# Altium PCB 整板PCB.PCBDOC
Units mil, origin at the board's own origin, x right, y up, seen from the top; angles counter-clockwise.
Board outline 4400 x 7900 mil, 2 copper layers (Top Layer, Bottom Layer); 64 components, 47 nets, 1632 pads, 16 vias.
Unrouted connection lines stored in the file: 2.
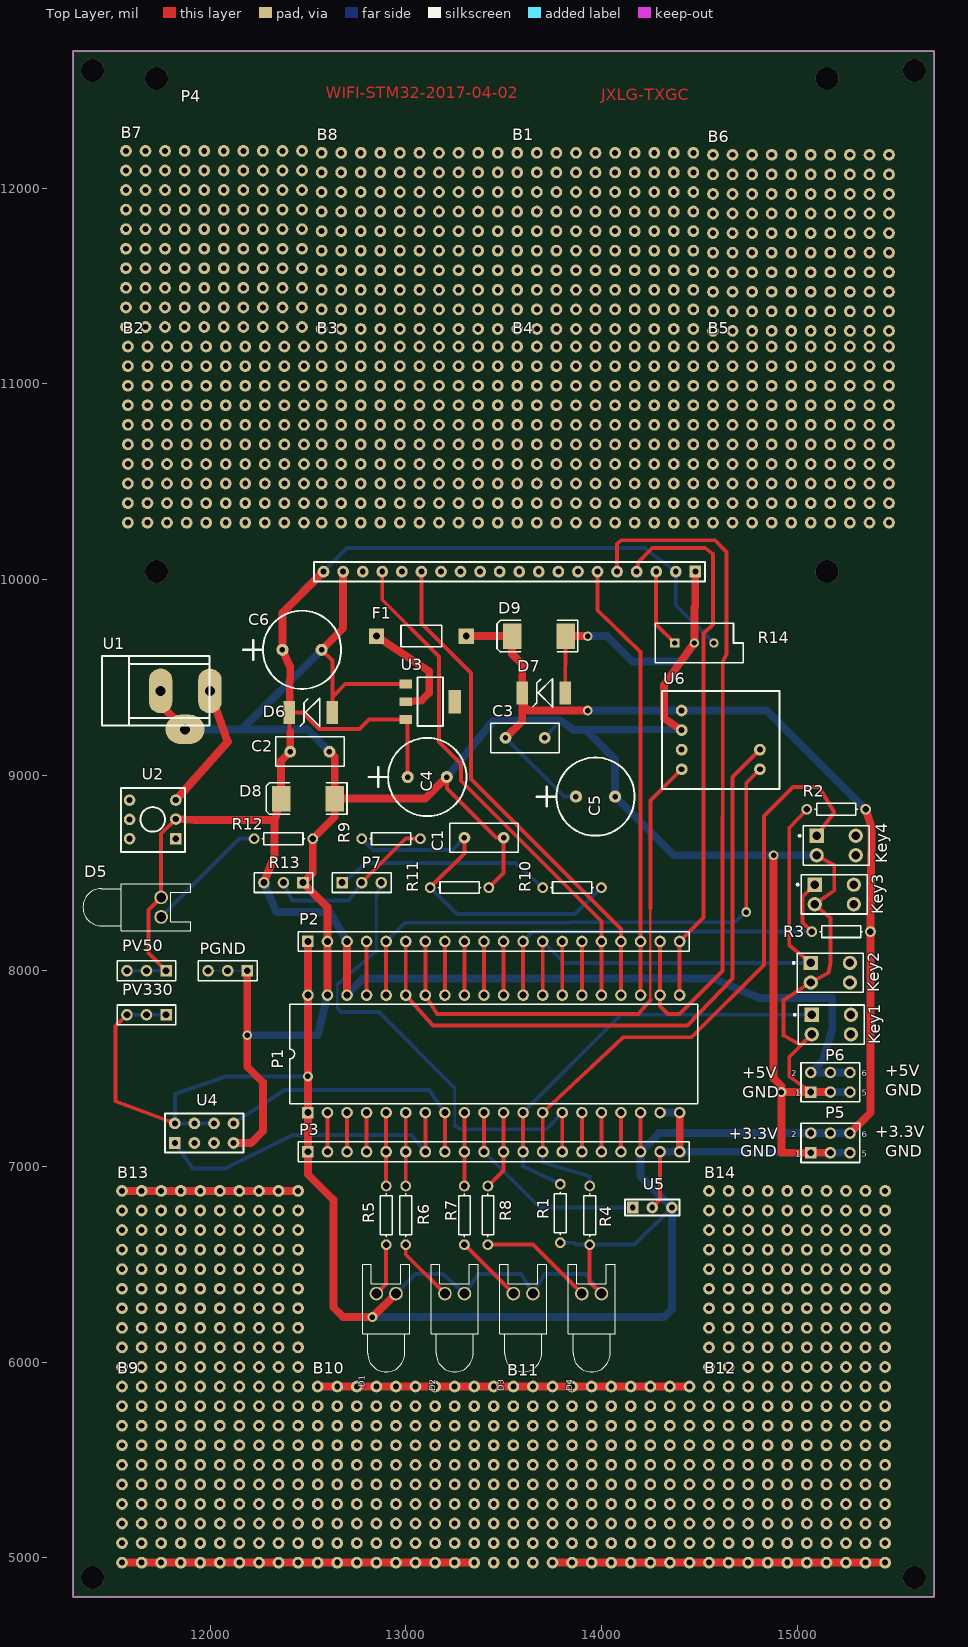
[diagram p0: Top Layer view]
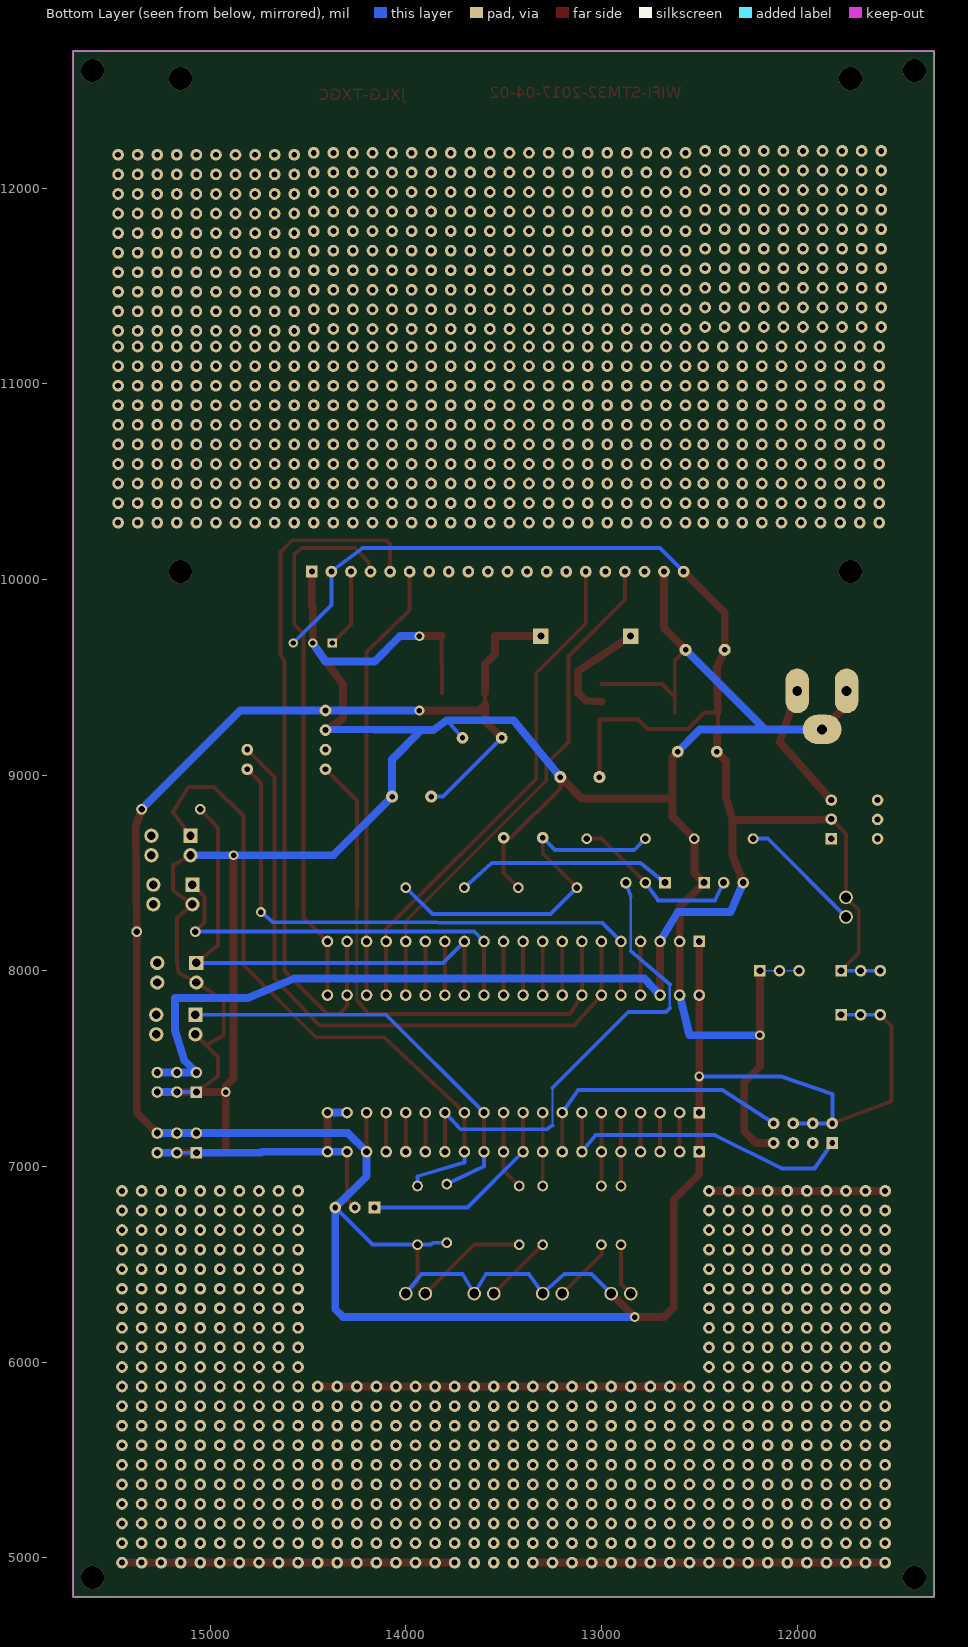
[diagram p1: Bottom Layer view, seen from below]

## Layer stack, top to bottom
Top Solder: solder mask 0.4, Solder Resist, Dk 3.5
Top Layer: signal copper 1.4
Dielectric1: dielectric 12.6, FR-4, Dk 4.8
Bottom Layer: signal copper 1.4
Bottom Solder: solder mask 0.4, Solder Resist, Dk 3.5

## Board outline
11300,4800 15700,4800 15700,12700 11300,12700

## Design rules (kind name [scope] priority, off if disabled: settings)
Clearance [All] p1: gap=10
FabricationTestPointUsage TestPointUsage [All] p1: valid=0 allowmultiple=FALSE
FabricationTestpoint Testpoint [(IsPad And (OnTopLayer Or OnBottomLayer))] p1: side=3 testpointundercomponent=TRUE minsize=40 maxsize=100 preferedsize=60 minholesize=0 maxholesize=40 preferedholesize=32 testpointgrid=1 allowsidetop=TRUE allowsidebottom=TRUE usegrid=TRUE gridtolerance=0.01
PolygonConnect [All] p1: connectstyle=Relief reliefconductorwidth=10 reliefentries=4 polygonreliefangle="90 Angle" airgapwidth=10
RoomDefinition POWER [InComponentClass('POWER')] p1: confinementstyle=ConfineIn formatcopy=TRUE lockcomponents=FALSE outline 0,0 2000,0 2000,1000 0,1000
RoomDefinition Peripherals [InComponentClass('Peripherals')] p2: confinementstyle=ConfineIn formatcopy=TRUE lockcomponents=FALSE outline 0,0 2000,0 2000,1000 0,1000
RoutingVias [All] p1: holewidth=28 width=50 viastyle="Through Hole" minholewidth=28 minwidth=50 maxholewidth=28 maxwidth=50
SolderMaskExpansion [All] p1: expansion=4
UnpouredPolygon [All] p1: allowunpoured=FALSE
Width [All] p1: maxlimit=40 minlimit=12 preferedwidth=20
27 further rules are at their usual default settings.

## Classes and differential pairs
component class Peripherals: C1 D1 D2 D3 D4 D6 D7 Key1 Key2 Key3 Key4 P1 P2 P3 P4 P5 P6 P7 PGND PV50 PV330 R1 R2 R3 R4 R5 R6 R7 R8 R9 R10 R11 R13 R14 U4 U5 U6
component class POWER: B1 B2 B3 B4 B5 B6 B7 B8 B9 B10 B11 B12 B13 B14 C2 C3 C4 C5 C6 D5 D8 D9 F1 R12 U1 U2 U3

## Components (designator, comment, footprint, x,y, rotation, side; value= is the part's Value field where it differs from the comment)
B1 "PAD" board 13570,12180 r0 top
B2 "PAD" board 11580,11190 r0 top
B3 "PAD" board 12570,11190 r0 top
B4 "PAD" board 13570,11190 r0 top
B5 "PAD" board 14570,11190 r0 top
B6 "PAD" board 14570,12170 r0 top
B7 "PAD" board 11570,12190 r0 top
B8 "PAD" board 12570,12180 r0 top
B9 "PAD" BOARD 11550,5875 r0 top
B10 "PAD" BOARD 12550,5875 r0 top
B11 "PAD" BOARD 13550,5875 r0 top
B12 "PAD" BOARD 14550,5875 r0 top
B13 "PAD" BOARD 11550,6875 r0 top
B14 "PAD" BOARD 14550,6875 r0 top
C1 "Cap" RAD-0.2 13400,8680 r180 top
C2 "Cap" RAD-0.2 12510,9120 r180 top
C3 "Cap" RAD-0.2 13610,9190 r180 top
C4 "Cap Pol1" RB.2/.4 13010,8990 r180 top
C5 "Cap Pol1" RB.2/.4 13870,8890 r180 top
C6 "Cap Pol1" RB.2/.4 12370,9640 r180 top
D1 "LED1" LED-0 12900,6350 r0 top
D2 "LED2" LED-0 13250,6350 r0 top
D3 "LED3" LED-0 13600,6350 r0 top
D4 "LED4" LED-0 13950,6350 r0 top
D5 "LED0" LED-0 11750,8325 r270 top
D6 "SMBJ5.0A" SMBJ 12520,9320 r180 top
D7 "SMBJ3.3A" SMBJ 13710,9420 r180 top
D8 "Diode" SMC 12500,8880 r180 top
D9 "Diode" SMC 13680,9710 r180 top
F1 "Fuse 2" PIN-W2/E2.8 13080,9710 r0 top
Key1 "" DPST-4 15175,7725 r0 top
Key2 "" DPST-4 15170,7990 r0 top
Key3 "" DPST-4 15190,8390 r0 top
Key4 "" DPST-4 15200,8640 r0 top
P1 "STM32F103" 711-03 13450,7575 r0 top
P2 "" HDR1X20 12500,8150 r0 top
P3 "" HDR1X20 12500,7075 r0 top
P4 "LCD" STM32F103C8T6 12580,10040 r0 top
P5 "Header 3X2" HDR2X3 15070,7070 r0 top
P6 "Header 3X2" HDR2X3 15070,7380 r0 top
P7 "" HDR1X3 12675,8450 r0 top
PGND "PINGNG" HDR1X3 12190,8000 r180 top
PV50 "PINV5.0" HDR1X3 11775,8000 r180 top
PV330 "PINV3.30" HDR1X3 11775,7775 r180 top
R1 "Res1" AXIAL-0.3 13790,6760 r270 top
R2 "Res1" AXIAL-0.3 15200,8825 r0 top
R3 "Res1" AXIAL-0.3 15225,8200 r0 top
R4 "Res1" AXIAL-0.3 13940,6750 r270 top
R5 "Res1" AXIAL-0.3 12900,6750 r90 top
R6 "Res1" AXIAL-0.3 13000,6750 r90 top
R7 "Res1" AXIAL-0.3 13300,6750 r90 top
R8 "Res1" AXIAL-0.3 13420,6750 r90 top
R9 "Res1" AXIAL-0.3 12925,8675 r180 top
R10 "Res1" AXIAL-0.3 13850,8425 r180 top
R11 "Res1" AXIAL-0.3 13275,8425 r180 top
R12 "Res1" AXIAL-0.3 12375,8675 r180 top
R13 "" HDR1X3 12475,8450 r180 top
R14 "W104" VR5 14475,9675 r0 top
U1 "DC005" POWER 11975,9125 r0 top
U2 "BUTTON" BTN8.5*8.5 11825,8675 r180 top
U3 "LM1117-3.3" SOT223 13125,9375 r270 top
U4 "ESP8266" ESP8266 11820,7120 r90 top
U5 "dh11" DH11 14160,6790 r90 top
U6 "VL53L0X" VL53L0X 14410,9330 r0 top

## Footprints (in the part's own frame and the unit in brackets; to place one, negate y for a bottom-side part, rotate by r counter-clockwise, add the part's x,y. Pads: shape width x height; smd on the part's side, far side on the other; paste and mask are expansions set on the pad)
711-03 [mm] "DIP; 40 Leads; Row Spacing 15.24 mm; Pitch 2.54 mm"
  rect 1.5x1.5 hole 0.9: 1(-24.13,-7.62)
  round 1.5 hole 0.9: 2(-21.59,-7.62) 3(-19.05,-7.62) 4(-16.51,-7.62) 5(-13.97,-7.62) 6(-11.43,-7.62) 7(-8.89,-7.62) 8(-6.35,-7.62) 9(-3.81,-7.62) 10(-1.27,-7.62) 11(1.27,-7.62) 12(3.81,-7.62) 13(6.35,-7.62) 14(8.89,-7.62) 15(11.43,-7.62) 16(13.97,-7.62) 17(16.51,-7.62) 18(19.05,-7.62) 19(21.59,-7.62) 20(24.13,-7.62) 21(24.13,7.62) 22(21.59,7.62) 23(19.05,7.62) 24(16.51,7.62) 25(13.97,7.62) 26(11.43,7.62) 27(8.89,7.62) 28(6.35,7.62) 29(3.81,7.62) 30(1.27,7.62) 31(-1.27,7.62) 32(-3.81,7.62) 33(-6.35,7.62) 34(-8.89,7.62) 35(-11.43,7.62) 36(-13.97,7.62) 37(-16.51,7.62) 38(-19.05,7.62) 39(-21.59,7.62) 40(-24.13,7.62)
  silkscreen extent -26.5,-6.45 26.5,6.45
AXIAL-0.3 [mm] "Axial Device, Thru-Hole; 2 Leads; 0.3 in Pin Spacing"
  round 1.4 hole 0.85: 1(-3.81,0) 2(3.81,0)
  silkscreen extent -2.77,-0.76 2.77,0.76
board [mil]
  round 60 hole 30: 0(0,0) 1(100,0) 2(200,0) 3(300,0) 4(400,0) 5(0,-100) 6(100,-100) 7(200,-100) 8(300,-100) 9(400,-100) 10(0,-200) 11(100,-200) 12(200,-200) 13(300,-200) 14(400,-200) 15(0,-300) 16(100,-300) 17(200,-300) 18(300,-300) 19(400,-300) 20(0,-400) 21(100,-400) 22(200,-400) 23(300,-400) 24(400,-400) 25(500,0) 26(600,0) 27(700,0) 28(800,0) 29(900,0) 30(500,-100) 31(600,-100) 32(700,-100) 33(800,-100) 34(900,-100) 35(500,-200) 36(600,-200) 37(700,-200) 38(800,-200) 39(900,-200) 40(500,-300) 41(600,-300) 42(700,-300) 43(800,-300) 44(900,-300) 45(500,-400) 46(600,-400) 47(700,-400) 48(800,-400) 49(900,-400) 50(0,-500) 51(100,-500) 52(200,-500) 53(300,-500) 54(400,-500) 55(0,-600) 56(100,-600) 57(200,-600) 58(300,-600) 59(400,-600) 60(0,-700) 61(100,-700) 62(200,-700) 63(300,-700) 64(400,-700) 65(0,-800) 66(100,-800) 67(200,-800) 68(300,-800) 69(400,-800) 70(0,-900) 71(100,-900) 72(200,-900) 73(400,-900) 74(300,-900) 75(500,-500) 76(600,-500) 77(700,-500) 78(800,-500) 79(900,-500) 80(500,-600) 81(600,-600) 82(700,-600) 83(800,-600) 84(900,-600) 85(500,-700) 86(600,-700) 87(700,-700) 88(800,-700) 89(900,-700) 90(500,-800) 91(600,-800) 92(700,-800) 93(800,-800) 94(900,-800) 95(500,-900) 96(600,-900) 97(700,-900) 98(800,-900) 99(900,-900)
BOARD [mil]
  round 60 hole 30: 0(0,0) 1(100,0) 2(200,0) 3(300,0) 4(400,0) 5(0,-100) 6(100,-100) 7(200,-100) 8(300,-100) 9(400,-100) 10(0,-200) 11(100,-200) 12(200,-200) 13(300,-200) 14(400,-200) 15(0,-300) 16(100,-300) 17(200,-300) 18(300,-300) 19(400,-300) 20(0,-400) 21(100,-400) 22(200,-400) 23(300,-400) 24(400,-400) 25(500,0) 26(600,0) 27(700,0) 28(800,0) 29(900,0) 30(500,-100) 31(600,-100) 32(700,-100) 33(800,-100) 34(900,-100) 35(500,-200) 36(600,-200) 37(700,-200) 38(800,-200) 39(900,-200) 40(500,-300) 41(600,-300) 42(700,-300) 43(800,-300) 44(900,-300) 45(500,-400) 46(600,-400) 47(700,-400) 48(800,-400) 49(900,-400) 50(0,-500) 51(100,-500) 52(200,-500) 53(300,-500) 54(400,-500) 55(0,-600) 56(100,-600) 57(200,-600) 58(300,-600) 59(400,-600) 60(0,-700) 61(100,-700) 62(200,-700) 63(300,-700) 64(400,-700) 65(0,-800) 66(100,-800) 67(200,-800) 68(300,-800) 69(400,-800) 70(0,-900) 71(100,-900) 72(200,-900) 73(400,-900) 74(300,-900) 75(500,-500) 76(600,-500) 77(700,-500) 78(800,-500) 79(900,-500) 80(500,-600) 81(600,-600) 82(700,-600) 83(800,-600) 84(900,-600) 85(500,-700) 86(600,-700) 87(700,-700) 88(800,-700) 89(900,-700) 90(500,-800) 91(600,-800) 92(700,-800) 93(800,-800) 94(900,-800) 95(500,-900) 96(600,-900) 97(700,-900) 98(800,-900) 99(900,-900)
BTN8.5*8.5 [mm]
  rect 1.5x1.5 hole 0.8: 1(0,0)
  round 1.5 hole 0.8: 2(0,-2.54) 3(0,-5) 4(6,-5) 5(6,-2.5) 6(6,0)
  silkscreen extent -1.2,-6.6 7.1,1.71
DH11 [mil]
  rect 60x60 hole 30: 1(0,0)
  round 60 hole 30: 2(0,-100) 3(0,-200)
  silkscreen extent -40,-240 40,40
DPST-4 [mm] "Double-Pole, Single-Throw Switch; 4 Leads"
  rect 1.85x1.85 hole 1.1: 1(-2.54,1.27)
  round 1.85 hole 1.1: 2(-2.54,-1.27) 3(2.54,-1.27) 4(2.54,1.27)
  silkscreen extent -4.88,-2.54 4.28,2.54
ESP8266 [mil]
  rect 60x60 hole 30: 0(0,0)
  round 60 hole 30: 1(100,0) 2(0,-100) 3(100,-100) 4(0,-200) 5(100,-200) 6(0,-300) 7(100,-300)
  silkscreen extent -50,-350 150,50
HDR1X3 [mm] "Connector; Header; 3 Position"
  rect 1.5x1.5 hole 0.9: 1(0,0)
  round 1.5 hole 0.9: 2(2.54,0) 3(5.08,0)
  silkscreen extent -1.27,-1.27 6.35,1.27
HDR1X20 [mm] "Connector; Header; 20 Position"
  rect 1.5x1.5 hole 0.9: 1(0,0)
  round 1.5 hole 0.9: 2(2.54,0) 3(5.08,0) 4(7.62,0) 5(10.16,0) 6(12.7,0) 7(15.24,0) 8(17.78,0) 9(20.32,0) 10(22.86,0) 11(25.4,0) 12(27.94,0) 13(30.48,0) 14(33.02,0) 15(35.56,0) 16(38.1,0) 17(40.64,0) 18(43.18,0) 19(45.72,0) 20(48.26,0)
  silkscreen extent -1.27,-1.27 49.53,1.27
HDR2X3 [mm] "Connector; Header; 3x2 Position"
  rect 1.5x1.5 hole 0.9: 1(0,0)
  round 1.5 hole 0.9: 2(0,2.54) 3(2.54,0) 4(2.54,2.54) 5(5.08,0) 6(5.08,2.54)
  silkscreen extent -1.27,-1.27 6.35,3.81
LED-0 [mil] "LED; 2 Leads"
  round 70 hole 50: 1(50,0) 2(-50,0)
  silkscreen extent -120,-400 120,150
PIN-W2/E2.8 [mm] "Thru-Hole; 2 Leads"
  rect 2x2 hole 0.9: 1(-5.825,0) 2(5.825,0)
  silkscreen extent -2.65,-1.4 2.65,1.4
POWER [mil]
  oval 120x228.74 hole 50: 1(24.18,305.39) 3(-227.79,305.39)
  oval 198.74x150 hole 50: 2(-102.98,108.54)
  silkscreen extent -528,128 23,482
RAD-0.2 [mil] "Radial Cap, Thru-Hole; 2 Leads; 0.2 in Pin Spacing"
  round 60 hole 27.56: 1(-100,0) 2(100,0)
  silkscreen extent -175,-75 175,75
RB.2/.4 [mil]
  round 62 hole 28: 1(0,0) 2(-200,0)
  silkscreen extent -300,-200 200,200
SMBJ [mm]
  rect 1.5x3 smd: 1(-2.667,0) 2(2.921,0)
  silkscreen extent -1.02,-1.85 1.52,1.83
SMC [mm] "DO-214-AB/SMC; 2 C-Bend Leads; Body 7.9 x 5.9 mm, inc. leads (LxW)"
  rect 2.4x3.3 smd: 1(-3.475,0) 2(3.475,0)
  silkscreen extent -5.08,-2.05 5.42,2.06
SOT223 [mil]
  rect 45x65 smd: 1(-91,-125) 2(0,-125) 3(91,-125)
  rect 118x65 smd: 4(0,125)
  silkscreen extent -125,-65 125,65
STM32F103C8T6 [mil]
  rect 60x60 hole 30: 0(1900,0)
  round 60 hole 30: 1(1800,0) 2(1700,0) 3(1600,0) 4(1500,0) 5(1400,0) 6(1300,0) 7(1200,0) 8(1100,0) 9(1000,0) 10(900,0) 11(800,0) 12(700,0) 13(600,0) 14(500,0) 15(400,0) 16(300,0) 17(200,0) 18(100,0) 19(0,0)
  silkscreen extent -50,-50 1950,50
VL53L0X [mil]
  round 60 hole 30: 0(0,0) 1(0,-100) 2(0,-200) 3(0,-300) 4(400,-200) 5(400,-300)
  silkscreen extent -100,-400 500,100
VR5 [mm] "Potentiometer; 3 Leads"
  rect 1.2x1.2 hole 0.7: 1(-2.54,0)
  round 1.2 hole 0.7: 2(0,0) 3(2.54,0)
  silkscreen extent -5.08,-2.54 6.35,2.54

## Part data
B1 B2 B3 B4 B5 B6 B7 B8 B9 B10 B11 B12 B13 B14: library part Antenna, "Generic Antenna"
C1 C2 C3: "Capacitor"
C4 C5 C6: "Polarized Capacitor (Radial)"
D1 D2 D3 D4: library part LED0, "Typical INFRARED GaAs LED"
D5: "Typical INFRARED GaAs LED"
D6 D7: library part SMBJ, "TVS"
D8 D9: "Default Diode"
F1: "Fuse"
Key1 Key2 Key3 Key4: library part SW-PB, "Switch"
P1: library part MC6805K2P, "8-Bit Microcomputer Unit with Serial Peripheral Interface and 2 Timers"
P2 P3: library part "Header 20", "Header, 20-Pin"
P5 P6: "Header, 3-Pin, Dual row"
P7 PGND PV50 PV330 R13: library part "Header 3", "Header, 3-Pin"
R1 R2 R3 R4 R5 R6 R7 R8 R9 R10 R11 R12: "Resistor"
U3: library part AMS1117-3.3

## Via types
v1: diameter 50, hole 28, Top Layer to Bottom Layer, 8 vias
v2: diameter 118.11, hole 118.11, Top Layer to Bottom Layer, 8 vias

## Nets (pads, with @x,y where several pads share a name; then routed paths per layer and width w, separated by ;. In a path a pad name is that pad's centre, name@x,y a point inside that pad or via, vN(x,y) a via of type N, cw(c..) or ccw(c..) an arc to the next point about the centre after c; other vN are vias at no path point)
+3.3V: C3.2 C5.1 D1.1 D2.1 D3.1 D4.1 D7.2 D9.2 F1.2 P1.1 P1.18 P1.40 P2.1 P3.1 P3.18 P5.2 P5.4 P5.6 PV330.1 PV330.2 PV330.3 R1.2 R2.2 R3.2 R4.2 U4.1 U4.3 U4.5 U5.3 U6.0 | length 15322.2
  Top Layer w20: PV330.3 11517,7717 11517,7333 U4.1 ; 13595,9360 D7.2 ; R4.2 13940,6410 D4.1 ; P3.18 P1.18
  Top Layer w40: P2.1 P1.40 P1.1 P3.1 12500,6960 12630,6830 12630,6280 12680,6230 v1(12830,6230) D1.1 ; F1.2 D9.2 13543.19,9618.81 13595,9567 D7.2 ; C3.2 13595,9275 13595,9360 13625,9330 v1(13930,9330) ; P5.6 15375,7275 R3.2 15380,8740 R2.2
  Bottom Layer w20: PV330.3 PV330.2 PV330.1 ; U4.5 U4.1 11820,7370 12080,7460 v1(12500,7460) ; D1.1 13050,6450 13190,6450 D2.1 13370,6450 13590,6450 D3.1 13710,6450 13920,6450 D4.1 ; C3.2 13810,8890 C5.1 ; R1.2 13860,6610 13870,6600 R4.2 14170,6600 U5.3
  Bottom Layer w40: v1(12830,6230) 14320,6230 14360,6270 U5.3 14200,6950 P3.18 14295,7170 P5.2 P5.4 P5.6 ; v1(13930,9330) U6.0 14845,9330 R2.2
+5V: U1.1 U2.3 | length 674.7
  Top Layer w40: U1.1 12090,9170
  Top Layer w43: U2.3 12090,9170
+5V_IN: C2.2 C4.1 C6.1 D5.2 D6.2 D8.2 P1.38 P2.3 P4.1 P4.19 P6.2 P6.4 P6.6 PV50.1 PV50.2 PV50.3 R13.3 R14.3 U2.2 U3.3 | length 10619.8
  Top Layer w20: PV50.1 11685,8090 11685,8310 D5.2 11750,8700 U2.2 ; 12410,9220 12405,9225 D6.2 12473,9320 12557,9236 12764,9236 12812,9284 U3.3 13010,9284 C4.1
  Top Layer w40: U2.2 11920,8770 12330,8770 ; R13.3 12330,8590 12330,8770 ; D6.2 12410,9550 C6.1 12370,9830 P4.19 ; 12410,9220 C2.2 12363.19,9073.19 D8.2 12330,8770 ; P1.38 P2.3
  Bottom Layer w20: PV50.3 PV50.2 PV50.1 ; P4.19 12700,10160 14220,10160 P4.1 14380,9870 R14.3
  Bottom Layer w40: R13.3 12340,8300 12610,8300 P2.3 ; P1.38 12780,7960 14570,7960 14810,7860 15180,7860 15180,7700 15132,7542 P6.2 P6.4 P6.6
ADC1_9: P7.2 R9.1 R13.2 | length 894.8
  Top Layer w20: P7.2 13000,8675 R9.1
  Bottom Layer w20: R13.2 12420,8360 12710,8360 P7.2
BAT+: P7.1 R10.2 | length 1107.8
  Bottom Layer w20: P7.1 12800,8550 13560,8550 R10.2
GND: C1.1 C2.1 C3.1 C4.2 C5.2 C6.2 D6.1 D7.1 D8.1 D9.1 Key1.2 Key2.2 Key3.2 Key4.2 P1.19 P1.20 P1.39 P2.2 P3.19 P3.20 P4.0 P4.18 P5.1 P5.3 P5.5 P6.1 P6.3 P6.5 PGND.1 PGND.2 PGND.3 R11.1 R12.1 R13.1 R14.2 U1.2 U1.3 U3.1 U4.6 U5.2 U6.1 | length 17708.1
  Top Layer w20: U1.3@11747.21,9358.35 U1.3 ; C6.2 12625,9585 12625,9400 ; D6.1 12625,9400 ; U3.1 12691,9466 12625,9400 ; C4.2 13210,8931.75 13461.75,8680 C1.1 13500,8500 R11.1 ; D7.1 13815,9565 13816.81,9566.81 D9.1 ; U5.2 14300,6830 P3.19 ; 14475,9858 14480,9863 ; P6.1 14960,7460 14960,7560 Key1.2 15020,7620 14930,7670 14930,7850 Key2.2 15160,7990 15170,8040 15170,8270 Key3.2 15190,8410 15190,8540 Key4.2
  Top Layer w40: U1.3@11747.21,9358.35 U1.2 ; U4.6 12210,7120 12270,7180 12270,7430 12190,7510 PGND.1 ; C6.2 12680,9750 P4.18 ; P1.39 P2.2 12600,8325 R13.1 12525,8500 R12.1 12636.81,8786.81 D8.1 ; C2.1 12636.81,9093.19 D8.1 ; C4.2 13100,8880 D8.1 ; D9.1 v1(13930,9710) ; P3.20 P1.20 ; U6.1 14320,9290 14320,9460 R14.2 14475,9858 ; 14480,9863 P4.0 ; v1(14880,8590) 14880,7450 14920,7410 14920,7070 P5.3 ; v1(14920,7380) P6.3
  Bottom Layer w20: C3.1 13790,9280 ; U6.1 U6.1@14410,9234 ; 14735,7075 14740,7070 ; P5.1 P5.3 ; P6.1 P6.3
  Bottom Layer w40: U1.2 12163.54,9233.54 ; v1(12190,7670) 12550,7670 P1.39 ; C6.2 12163.54,9233.54 ; C2.1 12496.46,9233.54 12163.54,9233.54 ; C4.2 13450,9280 13790,9280 13860,9230 13920,9230.44 U6.1@14409.97,9234 ; 13920,9230 14070,9080 C5.2 14370,8590 Key4.2 ; v1(13930,9710) 14030,9710 14160,9580 14410,9580 R14.2 ; P3.19 P3.20 14735,7075 ; P1.19 P1.20 ; 14740,7070 P5.1 ; P5.3 P5.5 ; P6.3 P6.5
NetC1_2: C1.2 R9.2 R10.1 R11.2 | length 1889.4
  Top Layer w20: R11.2 13300,8600 C1.2
  Bottom Layer w20: R9.2 12832,8618 13238,8618 C1.2 ; R11.2 13261,8289 13864,8289 R10.1
NetD1_2: D1.2 R5.1 | length 270.7
  Top Layer w20: D1.2 12900,6400 R5.1
NetD2_2: D2.2 R6.1 | length 332.8
  Top Layer w20: R6.1 13000,6550 D2.2
NetD3_2: D3.2 R7.1 | length 353.6
  Top Layer w20: R7.1 D3.2
NetD4_2: D4.2 R8.1 | length 583.6
  Top Layer w20: R8.1 13650,6600 D4.2
NetD5_1: D5.1 R12.2 | length 640.7
  Bottom Layer w20: D5.1 12150,8675 R12.2
NetP4_2: P4.2 R14.1 | length 404.4
  Top Layer w20: P4.2 14280,9770 R14.1
NRST: P1.17 P3.17 | length 200
  Top Layer w20: P3.17 P1.17
PA0: P1.5 P3.5 R5.2 | length 375
  Top Layer w20: R5.2 P3.5 P1.5
PA1: P1.6 P3.6 R6.2 | length 375
  Top Layer w20: R6.2 P3.6 P1.6
PA2: P1.7 P3.7 U4.0 | length 1628.4
  Top Layer w20: P3.7 P1.7
  Bottom Layer w20: U4.0 11910,6990 12080,6990 12420,7160 13030,7160 P3.7
PA3: P1.8 P3.8 U4.7 | length 1390.7
  Top Layer w20: P3.8 P1.8
  Bottom Layer w20: U4.7 12380,7390 13120,7390 P1.8
PA4: P1.9 P3.9 R7.2 | length 375
  Top Layer w20: R7.2 P3.9 P1.9
PA5: P1.10 P3.10 U5.1 | length 1078.1
  Top Layer w20: P3.10 P1.10
  Bottom Layer w20: P3.10 13685,6790 U5.1
PA6: P1.11 P3.11 R8.2 | length 408.1
  Top Layer w20: R8.2 13500,6980 P3.11 P1.11
PA7: Key1.1 P1.12 P3.12 R1.1 | length 2167.3
  Top Layer w20: P3.12 P1.12
  Bottom Layer w20: P3.12 13600,7057 13600,7000 R1.1 ; P1.12 14100,7775 Key1.1
PA8: P1.25 P2.16 P4.16 | length 2628.9
  Top Layer w20: P4.16 12880,9896 13169,9607 13169,9169 13282,9056 13282,8971 14000,8253 P2.16 P1.25
PA9: P1.26 P2.15 | length 275
  Top Layer w20: P1.26 P2.15
PA10: P1.27 P2.14 | length 275
  Top Layer w20: P1.27 P2.14
PA11: Key2.1 P1.28 P2.13 R2.1 | length 2563.6
  Top Layer w20: P1.28 P2.13 ; R2.1 14960,8730 14960,8130 Key2.1
  Bottom Layer w20: P2.13 13810,8040 Key2.1
PA12: Key3.1 P1.29 P2.12 R3.1 | length 2055.9
  Top Layer w20: P1.29 P2.12 ; R3.1 15028,8247 15028,8378 Key3.1
  Bottom Layer w20: P2.12 13650,8200 R3.1
PA15: P1.30 P2.11 | length 275
  Top Layer w20: P1.30 P2.11
PB0: Key4.1 P1.13 P3.13 R4.1 | length 3395.5
  Top Layer w20: P3.13 P1.13 14110,7660 14460,7660 14830,8030 14830,8790 14980,8940 15110,8940 15190,8810 Key4.1
  Bottom Layer w20: P3.13 13700,7020 13940,6950 R4.1
PB1: P1.14 P3.14 P7.3 | length 2490.2
  Top Layer w20: P3.14 P1.14
  Bottom Layer w12: 12650,7810 12650,7930 ; 12850,8100 12850,8380 ; 13250,7210 13250,7402
  Bottom Layer w20: 12650,7810 12670,7790 12863,7789 13250,7402 ; 12650,7930 12850,8100 ; 12850,8380 P7.3 ; 13250,7210 13280,7190 13720,7190 P1.14
PB3: P1.31 P2.10 | length 275
  Top Layer w20: P1.31 P2.10
PB4: P1.32 P2.9 | length 275
  Top Layer w20: P1.32 P2.9
PB5: P1.33 P2.8 | length 275
  Top Layer w20: P1.33 P2.8
PB6: P1.34 P2.7 U6.3 | length 2755.8
  Top Layer w12: 14250,7850 14250,8320
  Top Layer w20: P2.7 P1.34 13160,7780 14190,7780 14250,7850 ; 14250,8320 14250,8870 U6.3
PB7: P1.35 P2.6 U6.4 | length 3344.3
  Top Layer w20: P2.6 P1.35 13140,7720 14440,7720 14670,7960 14670,8990 U6.4
PB8: P1.36 P2.5 U6.5 | length 2931.5
  Top Layer w20: P1.36 P2.5 ; v1(14740,8300) 14740,8960 U6.5
  Bottom Layer w20: P2.5 12995,8245 14680,8250 v1(14740,8300)
PB9: P1.37 P2.4 | length 275
  Top Layer w20: P1.37 P2.4
PB10: P1.15 P3.15 | length 200
  Top Layer w20: P3.15 P1.15
PB11: P1.16 P3.16 | length 200
  Top Layer w20: P3.16 P1.16
PB12: P1.21 P2.20 P4.3 | length 2795.7
  Top Layer w20: P4.3 14190,10090 14260,10160 14530,10160 14570,10130 14570,9770 14522,9723 14522,8272 P2.20 P1.21
PB13: P1.22 P2.19 P4.4 | length 3635.1
  Top Layer w20: P4.4 14080,10180 14100,10200 14580,10200 14640,10140 14640,9620 14620,9580 14619,7999 14400,7780 14340,7780 14300,7820 P1.22 P2.19
PB14: P1.23 P2.18 P4.5 | length 2258.4
  Top Layer w20: P4.5 13980,9842.5 14200,9630 14200,9189 P2.18 P1.23
PB15: P1.24 P2.17 P4.14 | length 2587.5
  Top Layer w20: P4.14 13080,9774 13333,9521 13333,8980 14100,8213 P2.17 P1.24
PC13: P1.2 P3.2 | length 200
  Top Layer w20: P3.2 P1.2
PC14: P1.3 P3.3 | length 200
  Top Layer w20: P3.3 P1.3
PC15: P1.4 P3.4 | length 200
  Top Layer w20: P3.4 P1.4
V3.3_OUT: F1.1 U3.2 | length 570.7
  Top Layer w40: F1.1 13120,9530 13120,9420 13080,9380 U3.2
pads on no net: B1.0 B1.1 B1.2 B1.3 B1.4 B1.5 B1.6 B1.7 B1.8 B1.9 B1.10 B1.11 B1.12 B1.13 B1.14 B1.15 B1.16 B1.17 B1.18 B1.19 B1.20 B1.21 B1.22 B1.23 B1.24 B1.25 B1.26 B1.27 B1.28 B1.29 B1.30 B1.31 B1.32 B1.33 B1.34 B1.35 B1.36 B1.37 B1.38 B1.39 B1.40 B1.41 B1.42 B1.43 B1.44 B1.45 B1.46 B1.47 B1.48 B1.49 B1.50 B1.51 B1.52 B1.53 B1.54 B1.55 B1.56 B1.57 B1.58 B1.59 B1.60 B1.61 B1.62 B1.63 B1.64 B1.65 B1.66 B1.67 B1.68 B1.69 B1.70 B1.71 B1.72 B1.73 B1.74 B1.75 B1.76 B1.77 B1.78 B1.79 B1.80 B1.81 B1.82 B1.83 B1.84 B1.85 B1.86 B1.87 B1.88 B1.89 B1.90 B1.91 B1.92 B1.93 B1.94 B1.95 B1.96 B1.97 B1.98 B1.99 B2.0 B2.1 B2.2 B2.3 B2.4 B2.5 B2.6 B2.7 B2.8 B2.9 B2.10 B2.11 B2.12 B2.13 B2.14 B2.15 B2.16 B2.17 B2.18 B2.19 B2.20 B2.21 B2.22 B2.23 B2.24 B2.25 B2.26 B2.27 B2.28 B2.29 B2.30 B2.31 B2.32 B2.33 B2.34 B2.35 B2.36 B2.37 B2.38 B2.39 B2.40 B2.41 B2.42 B2.43 B2.44 B2.45 B2.46 B2.47 B2.48 B2.49 B2.50 B2.51 B2.52 B2.53 B2.54 B2.55 B2.56 B2.57 B2.58 B2.59 B2.60 B2.61 B2.62 B2.63 B2.64 B2.65 B2.66 B2.67 B2.68 B2.69 B2.70 B2.71 B2.72 B2.73 B2.74 B2.75 B2.76 B2.77 B2.78 B2.79 B2.80 B2.81 B2.82 B2.83 B2.84 B2.85 B2.86 B2.87 B2.88 B2.89 B2.90 B2.91 B2.92 B2.93 B2.94 B2.95 B2.96 B2.97 B2.98 B2.99 B3.0 B3.1 B3.2 B3.3 B3.4 B3.5 B3.6 B3.7 B3.8 B3.9 B3.10 B3.11 B3.12 B3.13 B3.14 B3.15 B3.16 B3.17 B3.18 B3.19 B3.20 B3.21 B3.22 B3.23 B3.24 B3.25 B3.26 B3.27 B3.28 B3.29 B3.30 B3.31 B3.32 B3.33 B3.34 B3.35 B3.36 B3.37 B3.38 B3.39 B3.40 B3.41 B3.42 B3.43 B3.44 B3.45 B3.46 B3.47 B3.48 B3.49 B3.50 B3.51 B3.52 B3.53 B3.54 B3.55 B3.56 B3.57 B3.58 B3.59 B3.60 B3.61 B3.62 B3.63 B3.64 B3.65 B3.66 B3.67 B3.68 B3.69 B3.70 B3.71 B3.72 B3.73 B3.74 B3.75 B3.76 B3.77 B3.78 B3.79 B3.80 B3.81 B3.82 B3.83 B3.84 B3.85 B3.86 B3.87 B3.88 B3.89 B3.90 B3.91 B3.92 B3.93 B3.94 B3.95 B3.96 B3.97 B3.98 B3.99 B4.0 B4.1 B4.2 B4.3 B4.4 B4.5 B4.6 B4.7 B4.8 B4.9 B4.10 B4.11 B4.12 B4.13 B4.14 B4.15 B4.16 B4.17 B4.18 B4.19 B4.20 B4.21 B4.22 B4.23 B4.24 B4.25 B4.26 B4.27 B4.28 B4.29 B4.30 B4.31 B4.32 B4.33 B4.34 B4.35 B4.36 B4.37 B4.38 B4.39 B4.40 B4.41 B4.42 B4.43 B4.44 B4.45 B4.46 B4.47 B4.48 B4.49 B4.50 B4.51 B4.52 B4.53 B4.54 B4.55 B4.56 B4.57 B4.58 B4.59 B4.60 B4.61 B4.62 B4.63 B4.64 B4.65 B4.66 B4.67 B4.68 B4.69 B4.70 B4.71 B4.72 B4.73 B4.74 B4.75 B4.76 B4.77 B4.78 B4.79 B4.80 B4.81 B4.82 B4.83 B4.84 B4.85 B4.86 B4.87 B4.88 B4.89 B4.90 B4.91 B4.92 B4.93 B4.94 B4.95 B4.96 B4.97 B4.98 B4.99 B5.0 B5.1 B5.2 B5.3 B5.4 B5.5 B5.6 B5.7 B5.8 B5.9 B5.10 B5.11 B5.12 B5.13 B5.14 B5.15 B5.16 B5.17 B5.18 B5.19 B5.20 B5.21 B5.22 B5.23 B5.24 B5.25 B5.26 B5.27 B5.28 B5.29 B5.30 B5.31 B5.32 B5.33 B5.34 B5.35 B5.36 B5.37 B5.38 B5.39 B5.40 B5.41 B5.42 B5.43 B5.44 B5.45 B5.46 B5.47 B5.48 B5.49 B5.50 B5.51 B5.52 B5.53 B5.54 B5.55 B5.56 B5.57 B5.58 B5.59 B5.60 B5.61 B5.62 B5.63 B5.64 B5.65 B5.66 B5.67 B5.68 B5.69 B5.70 B5.71 B5.72 B5.73 B5.74 B5.75 B5.76 B5.77 B5.78 B5.79 B5.80 B5.81 B5.82 B5.83 B5.84 B5.85 B5.86 B5.87 B5.88 B5.89 B5.90 B5.91 B5.92 B5.93 B5.94 B5.95 B5.96 B5.97 B5.98 B5.99 B6.0 B6.1 B6.2 B6.3 B6.4 B6.5 B6.6 B6.7 B6.8 B6.9 B6.10 B6.11 B6.12 B6.13 B6.14 B6.15 B6.16 B6.17 B6.18 B6.19 B6.20 B6.21 B6.22 B6.23 B6.24 B6.25 B6.26 B6.27 B6.28 B6.29 B6.30 B6.31 B6.32 B6.33 B6.34 B6.35 B6.36 B6.37 B6.38 B6.39 B6.40 B6.41 B6.42 B6.43 B6.44 B6.45 B6.46 B6.47 B6.48 B6.49 B6.50 B6.51 B6.52 B6.53 B6.54 B6.55 B6.56 B6.57 B6.58 B6.59 B6.60 B6.61 B6.62 B6.63 B6.64 B6.65 B6.66 B6.67 B6.68 B6.69 B6.70 B6.71 B6.72 B6.73 B6.74 B6.75 B6.76 B6.77 B6.78 B6.79 B6.80 B6.81 B6.82 B6.83 B6.84 B6.85 B6.86 B6.87 B6.88 B6.89 B6.90 B6.91 B6.92 B6.93 B6.94 B6.95 B6.96 B6.97 B6.98 B6.99 B7.0 B7.1 B7.2 B7.3 B7.4 B7.5 B7.6 B7.7 B7.8 B7.9 B7.10 B7.11 B7.12 B7.13 B7.14 B7.15 B7.16 B7.17 B7.18 B7.19 B7.20 B7.21 B7.22 B7.23 B7.24 B7.25 B7.26 B7.27 B7.28 B7.29 B7.30 B7.31 B7.32 B7.33 B7.34 B7.35 B7.36 B7.37 B7.38 B7.39 B7.40 B7.41 B7.42 B7.43 B7.44 B7.45 B7.46 B7.47 B7.48 B7.49 B7.50 B7.51 B7.52 B7.53 B7.54 B7.55 B7.56 B7.57 B7.58 B7.59 B7.60 B7.61 B7.62 B7.63 B7.64 B7.65 B7.66 B7.67 B7.68 B7.69 B7.70 B7.71 B7.72 B7.73 B7.74 B7.75 B7.76 B7.77 B7.78 B7.79 B7.80 B7.81 B7.82 B7.83 B7.84 B7.85 B7.86 B7.87 B7.88 B7.89 B7.90 B7.91 B7.92 B7.93 B7.94 B7.95 B7.96 B7.97 B7.98 B7.99 B8.0 B8.1 B8.2 B8.3 B8.4 B8.5 B8.6 B8.7 B8.8 B8.9 B8.10 B8.11 B8.12 B8.13 B8.14 B8.15 B8.16 B8.17 B8.18 B8.19 B8.20 B8.21 B8.22 B8.23 B8.24 B8.25 B8.26 B8.27 B8.28 B8.29 B8.30 B8.31 B8.32 B8.33 B8.34 B8.35 B8.36 B8.37 B8.38 B8.39 B8.40 B8.41 B8.42 B8.43 B8.44 B8.45 B8.46 B8.47 B8.48 B8.49 B8.50 B8.51 B8.52 B8.53 B8.54 B8.55 B8.56 B8.57 B8.58 B8.59 B8.60 B8.61 B8.62 B8.63 B8.64 B8.65 B8.66 B8.67 B8.68 B8.69 B8.70 B8.71 B8.72 B8.73 B8.74 B8.75 B8.76 B8.77 B8.78 B8.79 B8.80 B8.81 B8.82 B8.83 B8.84 B8.85 B8.86 B8.87 B8.88 B8.89 B8.90 B8.91 B8.92 B8.93 B8.94 B8.95 B8.96 B8.97 B8.98 B8.99 B9.0 B9.1 B9.2 B9.3 B9.4 B9.5 B9.6 B9.7 B9.8 B9.9 B9.10 B9.11 B9.12 B9.13 B9.14 B9.15 B9.16 B9.17 B9.18 B9.19 B9.20 B9.21 B9.22 B9.23 B9.24 B9.25 B9.26 B9.27 B9.28 B9.29 B9.30 B9.31 B9.32 B9.33 B9.34 B9.35 B9.36 B9.37 B9.38 B9.39 B9.40 B9.41 B9.42 B9.43 B9.44 B9.45 B9.46 B9.47 B9.48 B9.49 B9.50 B9.51 B9.52 B9.53 B9.54 B9.55 B9.56 B9.57 B9.58 B9.59 B9.60 B9.61 B9.62 B9.63 B9.64 B9.65 B9.66 B9.67 B9.68 B9.69 B9.70 B9.71 B9.72 B9.73 B9.74 B9.75 B9.76 B9.77 B9.78 B9.79 B9.80 B9.81 B9.82 B9.83 B9.84 B9.85 B9.86 B9.87 B9.88 B9.89 B9.90 B9.91 B9.92 B9.93 B9.94 B9.95 B9.96 B9.97 B9.98 B9.99 B10.0 B10.1 B10.2 B10.3 B10.4 B10.5 B10.6 B10.7 B10.8 B10.9 B10.10 B10.11 B10.12 B10.13 B10.14 B10.15 B10.16 B10.17 B10.18 B10.19 B10.20 B10.21 B10.22 B10.23 B10.24 B10.25 B10.26 B10.27 B10.28 B10.29 B10.30 B10.31 B10.32 B10.33 B10.34 B10.35 B10.36 B10.37 B10.38 B10.39 B10.40 B10.41 B10.42 B10.43 B10.44 B10.45 B10.46 B10.47 B10.48 B10.49 B10.50 B10.51 B10.52 B10.53 B10.54 B10.55 B10.56 B10.57 B10.58 B10.59 B10.60 B10.61 B10.62 B10.63 B10.64 B10.65 B10.66 B10.67 B10.68 B10.69 B10.70 B10.71 B10.72 B10.73 B10.74 B10.75 B10.76 B10.77 B10.78 B10.79 B10.80 B10.81 B10.82 B10.83 B10.84 B10.85 B10.86 B10.87 B10.88 B10.89 B10.90 B10.91 B10.92 B10.93 B10.94 B10.95 B10.96 B10.97 B10.98 B10.99 B11.0 B11.1 B11.2 B11.3 B11.4 B11.5 B11.6 B11.7 B11.8 B11.9 B11.10 B11.11 B11.12 B11.13 B11.14 B11.15 B11.16 B11.17 B11.18 B11.19 B11.20 B11.21 B11.22 B11.23 B11.24 B11.25 B11.26 B11.27 B11.28 B11.29 B11.30 B11.31 B11.32 B11.33 B11.34 B11.35 B11.36 B11.37 B11.38 B11.39 B11.40 B11.41 B11.42 B11.43 B11.44 B11.45 B11.46 B11.47 B11.48 B11.49 B11.50 B11.51 B11.52 B11.53 B11.54 B11.55 B11.56 B11.57 B11.58 B11.59 B11.60 B11.61 B11.62 B11.63 B11.64 B11.65 B11.66 B11.67 B11.68 B11.69 B11.70 B11.71 B11.72 B11.73 B11.74 B11.75 B11.76 B11.77 B11.78 B11.79 B11.80 B11.81 B11.82 B11.83 B11.84 B11.85 B11.86 B11.87 B11.88 B11.89 B11.90 B11.91 B11.92 B11.93 B11.94 B11.95 B11.96 B11.97 B11.98 B11.99 B12.0 B12.1 B12.2 B12.3 B12.4 B12.5 B12.6 B12.7 B12.8 B12.9 B12.10 B12.11 B12.12 B12.13 B12.14 B12.15 B12.16 B12.17 B12.18 B12.19 B12.20 B12.21 B12.22 B12.23 B12.24 B12.25 B12.26 B12.27 B12.28 B12.29 B12.30 B12.31 B12.32 B12.33 B12.34 B12.35 B12.36 B12.37 B12.38 B12.39 B12.40 B12.41 B12.42 B12.43 B12.44 B12.45 B12.46 B12.47 B12.48 B12.49 B12.50 B12.51 B12.52 B12.53 B12.54 B12.55 B12.56 B12.57 B12.58 B12.59 B12.60 B12.61 B12.62 B12.63 B12.64 B12.65 B12.66 B12.67 B12.68 B12.69 B12.70 B12.71 B12.72 B12.73 B12.74 B12.75 B12.76 B12.77 B12.78 B12.79 B12.80 B12.81 B12.82 B12.83 B12.84 B12.85 B12.86 B12.87 B12.88 B12.89 B12.90 B12.91 B12.92 B12.93 B12.94 B12.95 B12.96 B12.97 B12.98 B12.99 B13.0 B13.1 B13.2 B13.3 B13.4 B13.5 B13.6 B13.7 B13.8 B13.9 B13.10 B13.11 B13.12 B13.13 B13.14 B13.15 B13.16 B13.17 B13.18 B13.19 B13.20 B13.21 B13.22 B13.23 B13.24 B13.25 B13.26 B13.27 B13.28 B13.29 B13.30 B13.31 B13.32 B13.33 B13.34 B13.35 B13.36 B13.37 B13.38 B13.39 B13.40 B13.41 B13.42 B13.43 B13.44 B13.45 B13.46 B13.47 B13.48 B13.49 B13.50 B13.51 B13.52 B13.53 B13.54 B13.55 B13.56 B13.57 B13.58 B13.59 B13.60 B13.61 B13.62 B13.63 B13.64 B13.65 B13.66 B13.67 B13.68 B13.69 B13.70 B13.71 B13.72 B13.73 B13.74 B13.75 B13.76 B13.77 B13.78 B13.79 B13.80 B13.81 B13.82 B13.83 B13.84 B13.85 B13.86 B13.87 B13.88 B13.89 B13.90 B13.91 B13.92 B13.93 B13.94 B13.95 B13.96 B13.97 B13.98 B13.99 B14.0 B14.1 B14.2 B14.3 B14.4 B14.5 B14.6 B14.7 B14.8 B14.9 B14.10 B14.11 B14.12 B14.13 B14.14 B14.15 B14.16 B14.17 B14.18 B14.19 B14.20 B14.21 B14.22 B14.23 B14.24 B14.25 B14.26 B14.27 B14.28 B14.29 B14.30 B14.31 B14.32 B14.33 B14.34 B14.35 B14.36 B14.37 B14.38 B14.39 B14.40 B14.41 B14.42 B14.43 B14.44 B14.45 B14.46 B14.47 B14.48 B14.49 B14.50 B14.51 B14.52 B14.53 B14.54 B14.55 B14.56 B14.57 B14.58 B14.59 B14.60 B14.61 B14.62 B14.63 B14.64 B14.65 B14.66 B14.67 B14.68 B14.69 B14.70 B14.71 B14.72 B14.73 B14.74 B14.75 B14.76 B14.77 B14.78 B14.79 B14.80 B14.81 B14.82 B14.83 B14.84 B14.85 B14.86 B14.87 B14.88 B14.89 B14.90 B14.91 B14.92 B14.93 B14.94 B14.95 B14.96 B14.97 B14.98 B14.99 Key1.3 Key1.4 Key2.3 Key2.4 Key3.3 Key3.4 Key4.3 Key4.4 P4.6 P4.7 P4.8 P4.9 P4.10 P4.11 P4.12 P4.13 P4.15 P4.17 U2.1 U2.4 U2.5 U2.6 U3.4 U4.2 U4.4 U6.2
copper on no net: | length 6500
  Top Layer w40: 11550,4975 13350,4975 ; 11550,6875 12450,6875 ; 12550,5875 14450,5875 ; 13750,4975 15450,4975
  Bottom Layer w10: 11990,8000 12090,8000 12190,8000
  other v2: 11400,4900 15600,4900 11727,10040 15152,10040 11727,12560 15152,12560 11400,12600 15600,12600

## Keep-outs
Keep-Out Layer:
  region: 0,0 10,0 10,10 0,10
  lines w10: 11300,4800 15700,4800 15700,12700 15500,12700 11300,12700 11300,4800

## Other copper
Top Layer:
  text "WIFI-STM32-2017-04-02" at 12590,12460 h60
  text "JXLG-TXGC" at 14000,12450 h60

## Silkscreen, mask and mechanical layers (free items; w line width, h text height)
Top Overlay:
  text "+5V" at 15450,7460 h60
  text "+5V" at 14720,7450 h60
  text "GND" at 15450,7360 h60
  text "GND" at 14720,7350 h60
  text "+3.3V" at 15400,7150 h60
  text "+3.3V" at 14650,7140 h60
  text "GND" at 14710,7050 h60
  text "GND" at 15450,7050 h60

## Text inside footprints (layer, text, board x,y; h text height)
P5: Top Overlay "1" at 14990,7050 h31.5; Top Overlay "2" at 14970,7150 h31.5; Top Overlay "5" at 15330,7050 h31.5; Top Overlay "6" at 15330,7150 h31.5
P6: Top Overlay "1" at 14990,7360 h31.5; Top Overlay "2" at 14970,7460 h31.5; Top Overlay "5" at 15330,7360 h31.5; Top Overlay "6" at 15330,7460 h31.5